# EAGLE board PotBreakout (EAGLE 7.5.0)
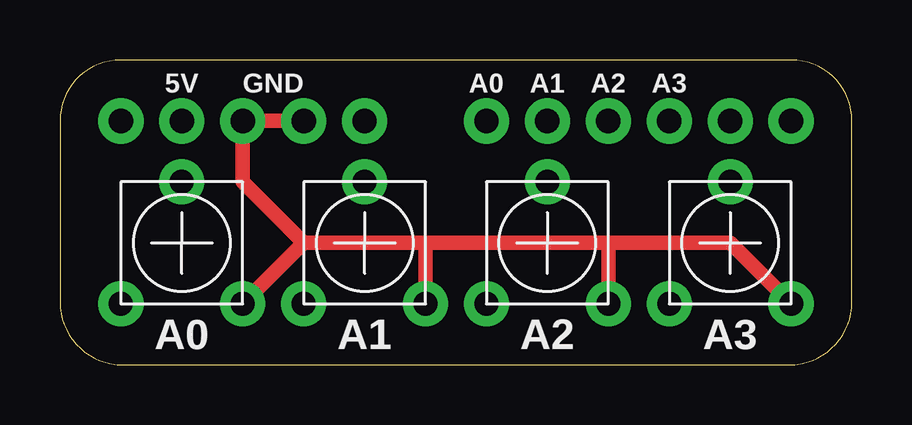
[diagram p0: board, top side]
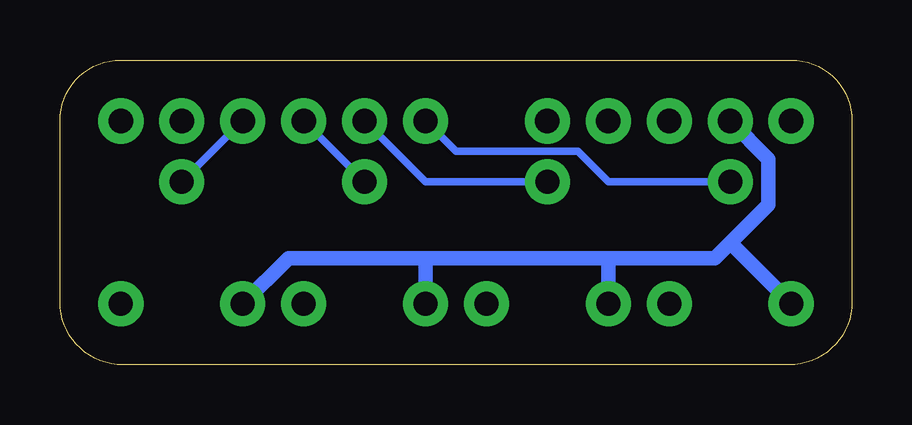
[diagram p1: board, bottom side, seen from below]

Size 33.02 x 12.7 mm. Coordinates in mm from the lower left corner, seen from the top.
Outline: 0,10.16 0,2.62 arc90 2.62,0 30.4,0 arc90 33.02,2.62 33.02,10.16 arc90 30.48,12.7 2.54,12.7 arc90 0,10.16
Copper layers (1*16): Top 0.0356mm / dielectric 1.5011mm / Bottom 0.0356mm
Design rules "LaenPCBOrder": minimum track width 6mil, minimum drill 13mil, track to track 6mil, track to pad 6mil, pad to pad 6mil, via to via 6mil, smd to smd 6mil, copper to edge 15mil, drill to drill 6mil, minimum pad ring 7mil, minimum via ring 7mil, stop-mask expansion 3mil, vias tented up to drill 0mil, thermal gap 10mil

## Footprints (pad centres in the part's own frame; a part is rotated, then mirrored left to right if it is on the bottom)
1X06 = drill 1.016 pad 1.88: 1 0,0; 2 2.54,0; 3 5.08,0; 4 7.62,0; 5 10.16,0; 6 12.7,0
1X05_NO_SILK = drill 1.016 pad 1.88: 1 0,0; 2 2.54,0; 3 5.08,0; 4 7.62,0; 5 10.16,0
TRIM_POT_PTH = drill 1 pad 1.88: 1 -2.54,-2.54; 2 0,2.54; 3 2.54,-2.54

## Placement (x,y rotation side)
JP1  [1X06]  30.48,10.16 180 top
JP2  [1X05_NO_SILK]  12.7,10.16 180 top
R1  TRIMPOTPTH  [TRIM_POT_PTH]  5.08,5.08 0 top
R2  TRIMPOTPTH  [TRIM_POT_PTH]  12.7,5.08 0 top
R3  TRIMPOTPTH  [TRIM_POT_PTH]  20.32,5.08 0 top
R4  TRIMPOTPTH  [TRIM_POT_PTH]  27.94,5.08 0 top

## Library data of the parts
JP1 JP2 = SparkFun-Connectors
R1-R4 = SparkFun-Electromechanical

## Nets
3.3V: JP2.5
5V: JP2.4 R1.1 R2.1 R3.1 R4.1
A0: JP1.6 R1.2
A1: JP1.5 R2.2
A2: JP1.4 R3.2
A3: JP1.3 R4.2
A4: JP1.2
A5: JP1.1
GND: JP2.2 JP2.3 R1.3 R2.3 R3.3 R4.3
VIN: JP2.1

## Tracks (layer width: path | path; a pad name or v marks a point on that pad's centre or on a via)
5V
  Bottom 0.61: 10.16,4.45 5.71,4.45 5.08,5.08 | 10.16,4.45 17.78,4.45 | 17.78,4.45 23.5,4.45 R4.1 | 5.08,5.08 3.49,6.67 3.49,8.57 JP2.4 | R1.1 5.08,5.08 | R2.1 10.16,4.45 | R3.1 17.78,4.45
A0
  Bottom 0.305: R1.2 10.16,7.62 11.43,8.89 16.51,8.89 JP1.6
A1
  Bottom 0.305: R2.2 17.78,7.62 JP1.5
A2
  Bottom 0.305: R3.2 JP1.4
A3
  Bottom 0.305: R4.2 JP1.3
GND
  Top 0.61: JP2.2 JP2.3 7.62,7.62 10.16,5.08 | 22.86,5.08 15.24,5.08 | 15.24,5.08 10.16,5.08 | 10.16,5.08 R1.3 | R2.3 15.24,5.08 | R3.3 22.86,5.08 | R4.3 27.94,5.08 22.86,5.08

## Text on the board
tPlace: 5V | GND | A0 | A1 | A2 | A3 | A0 | A1 | A2 | A3